# Altium PCB ADF4351_PLL.PcbDoc
Units mil, origin at the board's own origin, x right, y up, seen from the top; angles counter-clockwise.
Board outline 1874.02 x 1496.06 mil, 4 copper layers (Top Layer, GND, Power, Bottom Layer), stack 30.634 mil thick; 76 components, 40 nets, 220 pads, 215 vias.
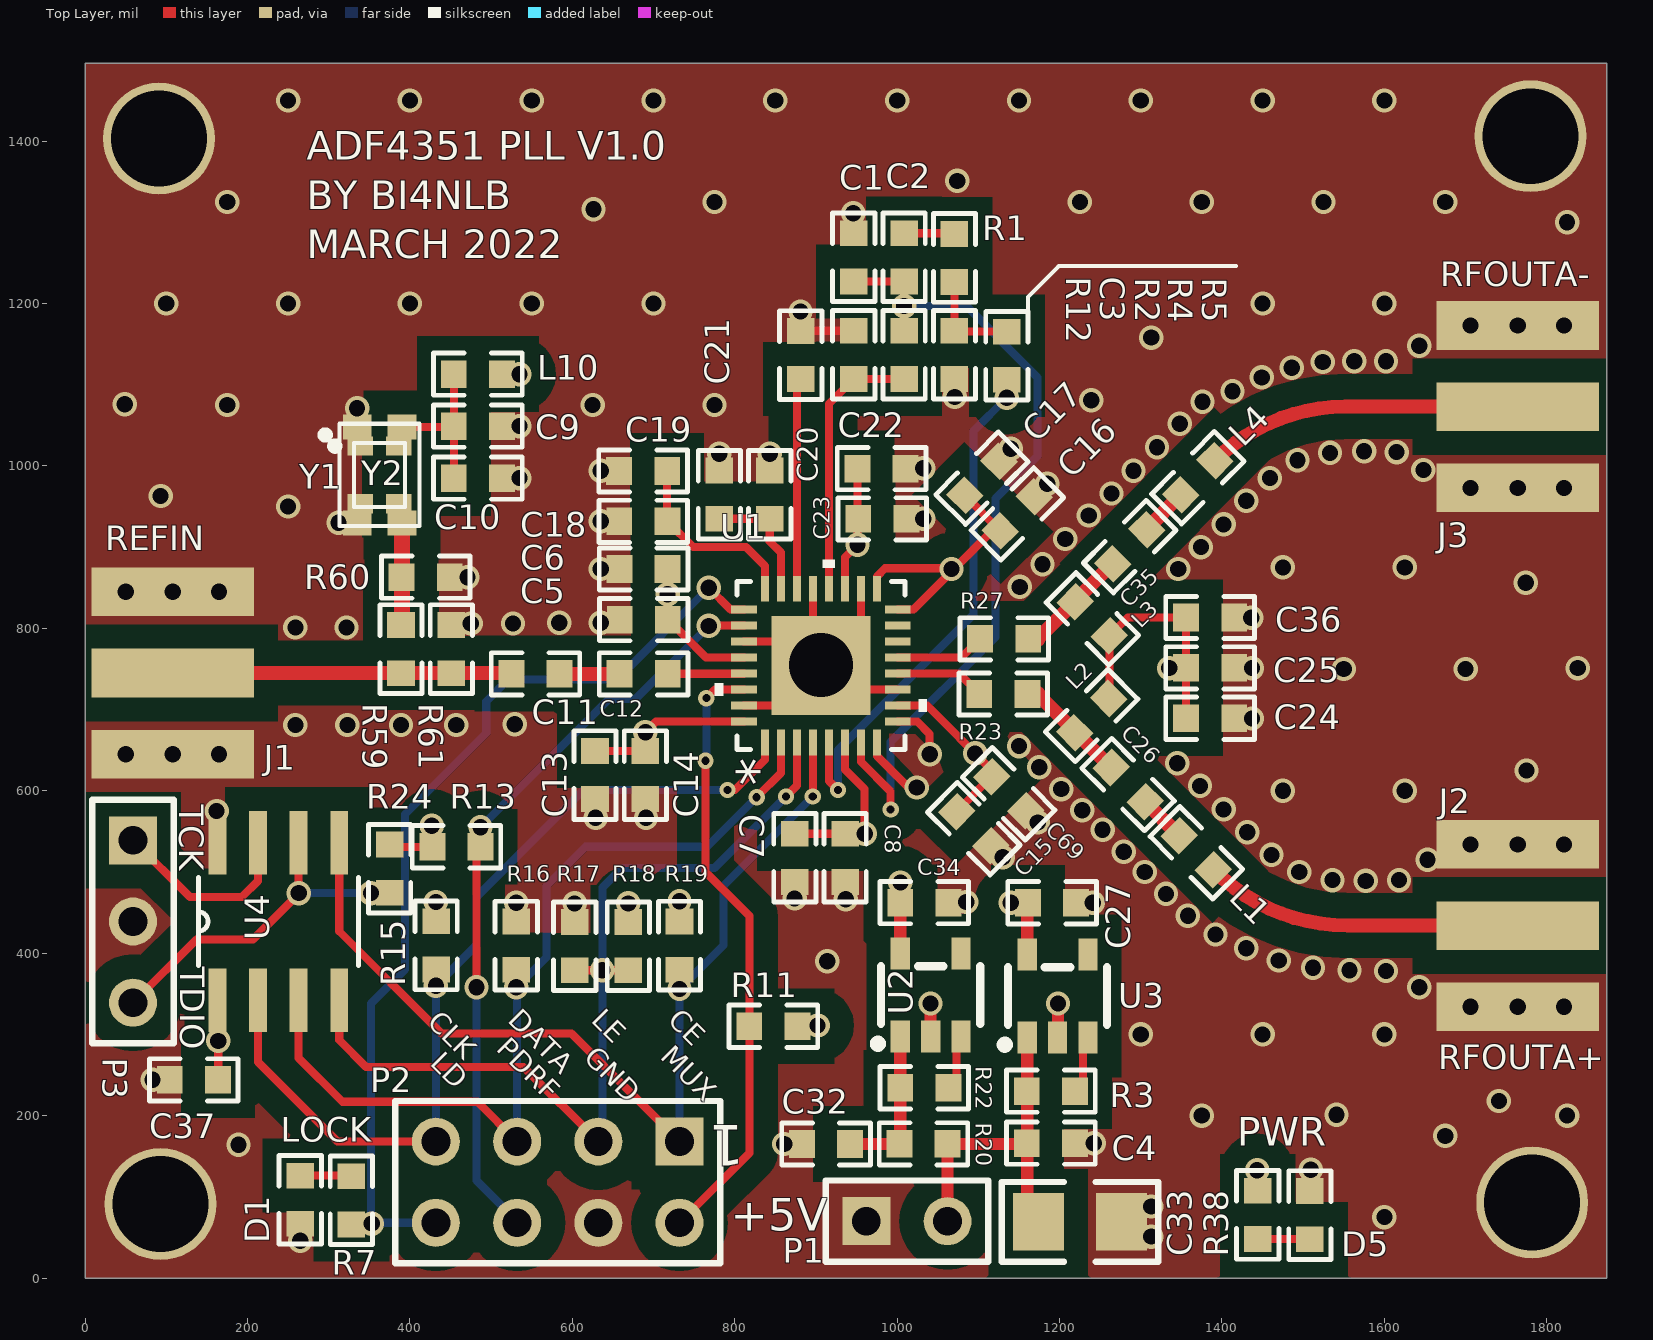
[diagram p0: Top Layer view]
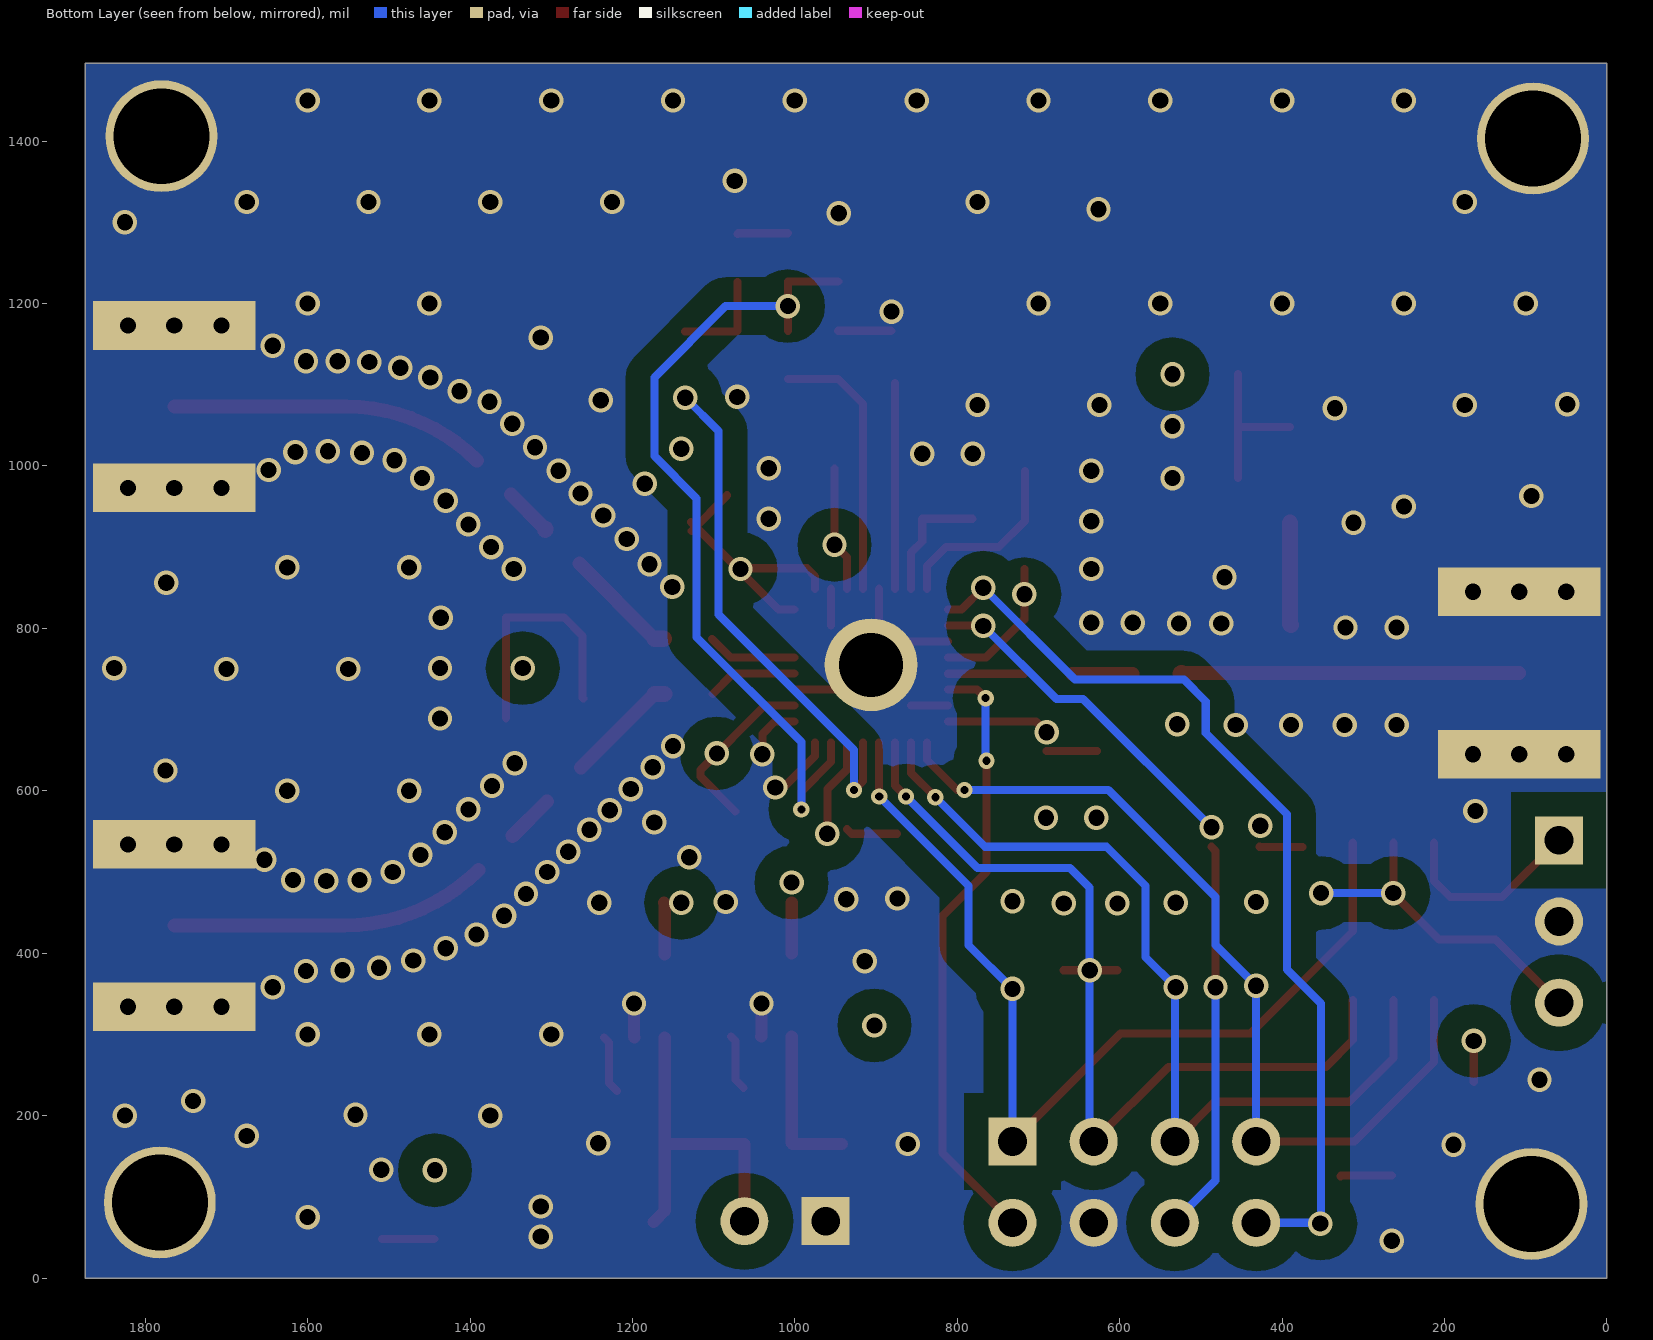
[diagram p1: Bottom Layer view, seen from below]
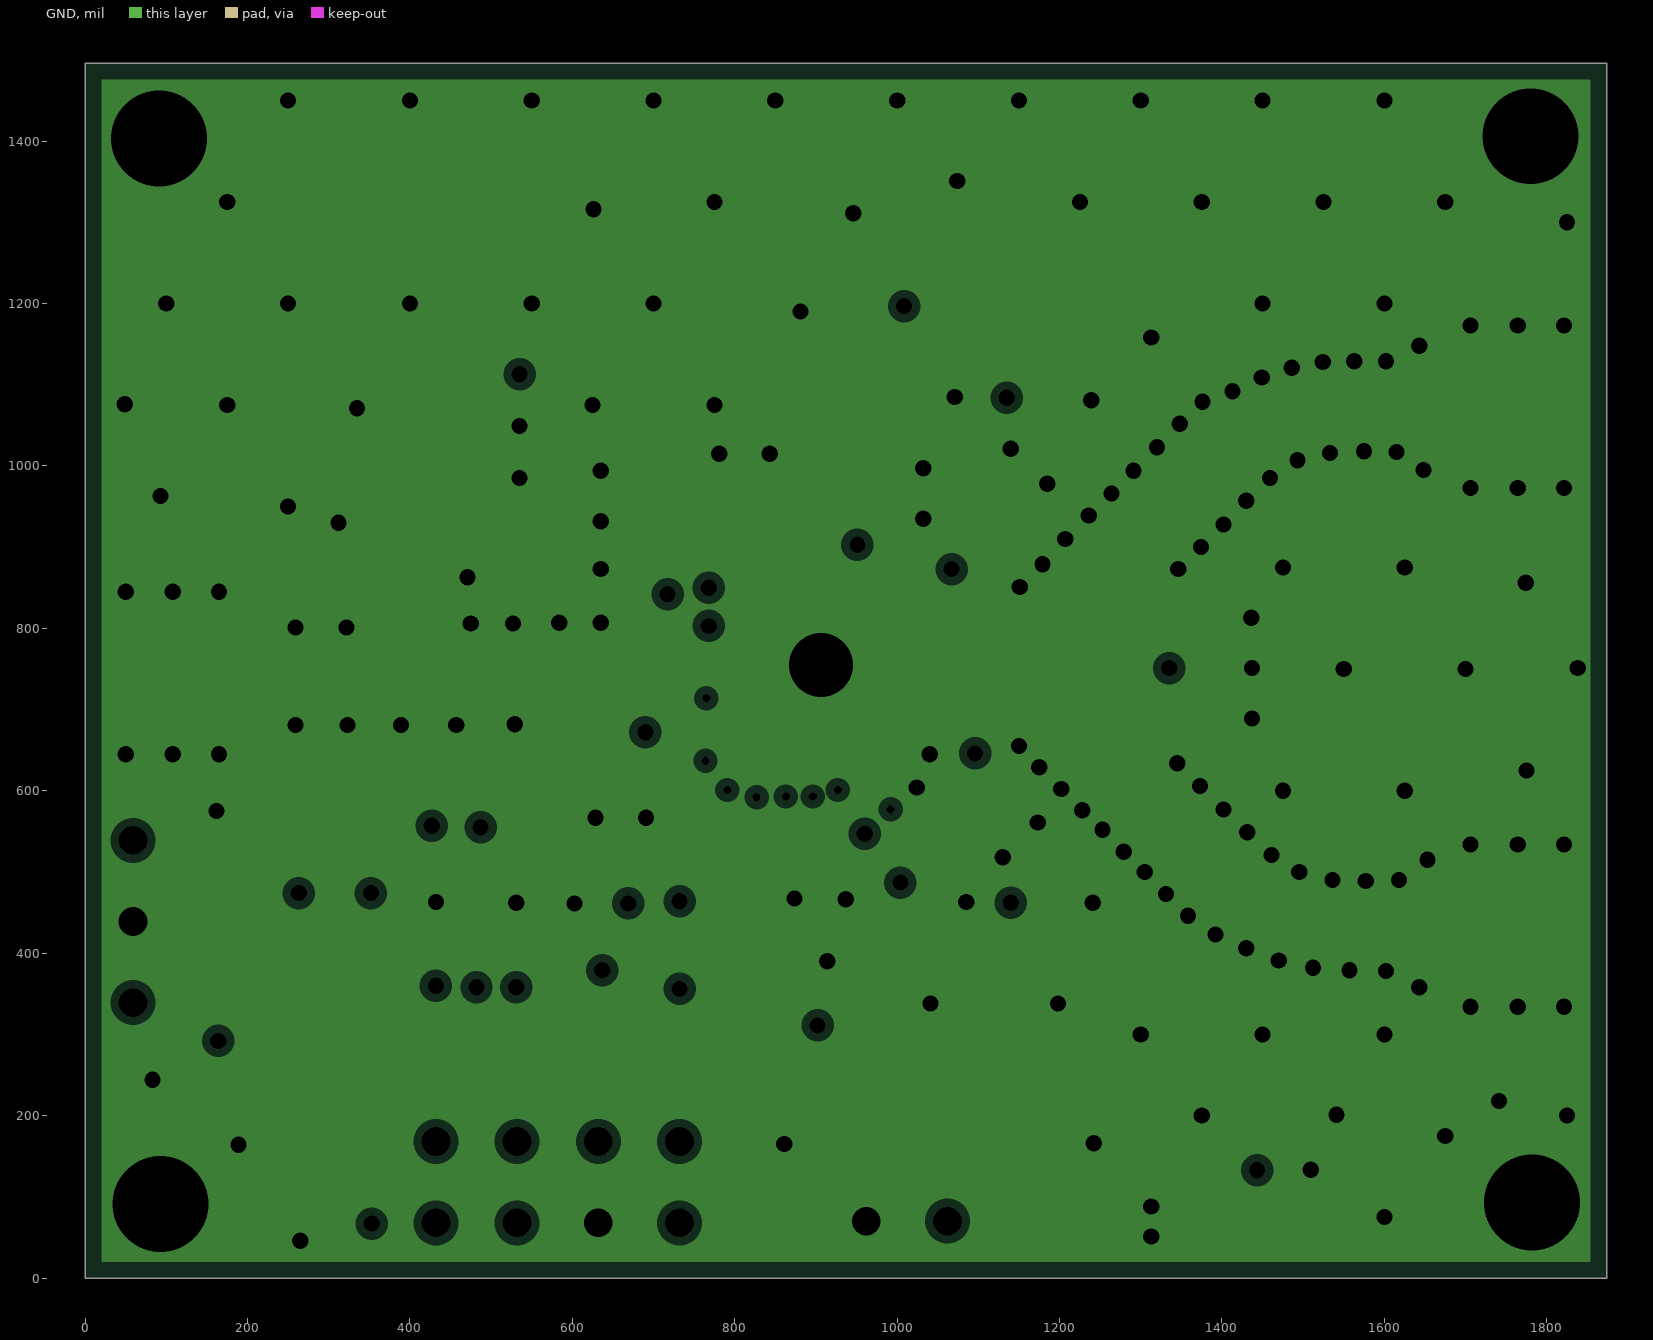
[diagram p2: GND, clearances drawn from the general rule]
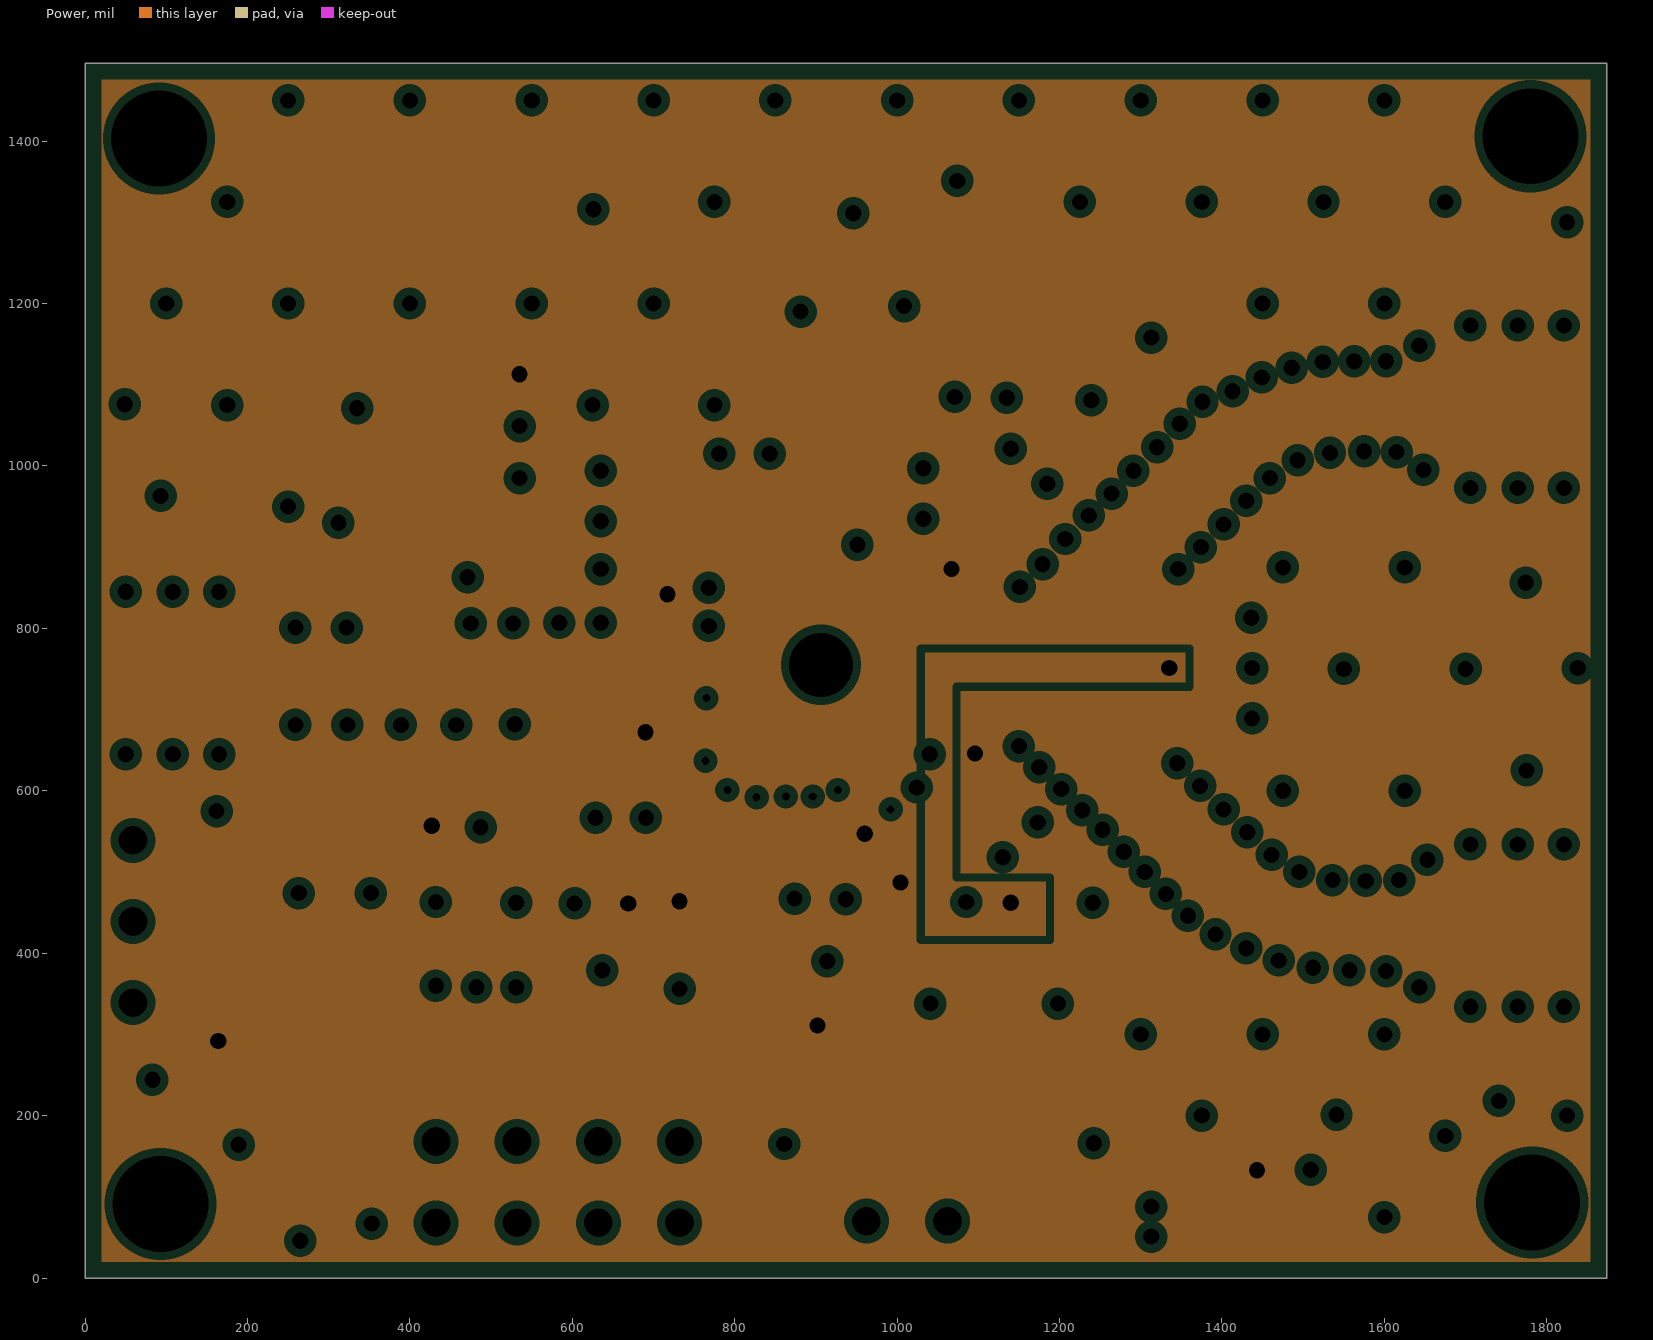
[diagram p3: Power, clearances drawn from the general rule]

## Layer stack, top to bottom
Top Solder: solder mask 0.4, Solder Resist, Dk 3.5
Top Layer: signal copper 1.4
Dielectric 1: core 10, FR-4, Dk 4.2
GND: plane copper 1.417, net GND
Dielectric 3: prepreg 5, Dk 4.2
Power: plane copper 1.417, net AVDD
Dielectric 2: core 10, Dk 4.2
Bottom Layer: signal copper 1.4
Bottom Solder: solder mask 0.4, Solder Resist, Dk 3.5

## Board outline
0,1496.06 0,0 1874.02,0 1874.02,1496.06 0,1496.06

## Design rules (kind name [scope] priority, off if disabled: settings)
Clearance [All] p1: gap=5
ComponentClearance [All] p1: gap=0 collisioncheckmode=3 verticalgap=0 showdistances=FALSE
HoleSize [All] p1: absolutevalues=TRUE maxlimit=1000 minlimit=1 maxpercent=80.000 minpercent=20.000
HoleToHoleClearance [All] p1: gap=0 allowstackedmicrovias=TRUE
MinimumSolderMaskSliver [All] p1: minsoldermaskwidth=0
PlaneClearance [All] p1: clearance=10
PlaneConnect [All] p1: planeconnectstyle=Direct reliefexpansion=20 reliefentries=4 reliefconductorwidth=10 reliefairgap=10
PolygonConnect [All] p1: connectstyle=Direct reliefconductorwidth=10 reliefentries=4 polygonreliefangle="90 Angle" airgapwidth=10
RoutingVias [All] p1: holewidth=28 width=50 viastyle="Through Hole" minholewidth=5 minwidth=5 maxholewidth=30 maxwidth=50
SilkToSilkClearance [All] p1: silktosilkclearance=0
SilkToSolderMaskClearance [IsPad] p1: minsilkscreentomaskgap=0 clearancetoexposedcopper=TRUE
SolderMaskExpansion [All] p1: expansion=4
UnpouredPolygon [All] p1: allowunpoured=FALSE
Width [All] p1: maxlimit=100 minlimit=10 preferedwidth=10 minimp=50.000000 maximp=50.000000 favimp=50.000000
21 further rules are at their usual default settings.

## Components (designator, comment, footprint, x,y, rotation, side; value= is the part's Value field where it differs from the comment)
C1 "Cap" 0603E#1 946.53,1286.44 r270 top
C2 "Cap" 0603E#1 1008.53,1286.44 r270 top
C3 "Cap" 0603E#1 946.53,1166.44 r270 top
C4 "Cap" 0603E#1 1159.69,166.1 r0 top
C5 "Cap" 0603E#1 717.6,810.78 r180 top
C6 "Cap" 0603E#1 717.35,873.1 r180 top
C7 "Cap" 0603E#1 874,547 r270 top
C8 "Cap" 0603E#1 936,547 r270 top
C9 "Cap" 0603E#1 454.08,1049 r0 top
C10 "Cap" 0603E#1 454.08,985 r0 top
C11 "Cap" 0603E#1 525,744 r0 top
C12 "Cap" 0603E#1 658.08,744 r0 top
C13 "Cap" 0603E#1 628,649 r270 top
C14 "Cap" 0603E#1 690,649 r270 top
C15 "Cap" 0603E#1 1073.38,574.31 r315 top
C16 "Cap" 0603E#1 1127,920 r45 top
C17 "Cap" 0603E#1 1083.47,963.91 r45 top
C18 "Cap" 0603E#1 717.16,931.77 r180 top
C19 "Cap" 0603E#1 716.8,993.77 r180 top
C20 "Cap" 0603E#1 843.08,935 r90 top
C21 "Cap" 0603E#1 781.08,935 r90 top
C22 "Cap" 0603E#1 951.12,996.72 r0 top
C23 "Cap" 0603E#1 952.12,934.72 r0 top
C24 "Cap" 0603E#1 1355.69,689.32 r0 top
C25 "Cap" 0603E#1 1355.69,751.32 r0 top
C26 "Cap" 0603E#1 1263.4,628.6 r315 top
C27 "Cap" 0603E#1 1161.09,462.09 r0 top
C32 "Cap" 0603E#1 942.08,165 r180 top
C33 "Cap" R1206 1225.08,69 r0 top
C34 "Cap" 0603E#1 1003.87,462.29 r0 top
C35 "Cap" 0603E#1 1265.4,879.6 r45 top
C36 "Cap" 0603E#1 1355.69,813.32 r0 top
C37 "Cap" 0603E#2 134,244 r180 top
C69 "Cap" 0603E#1 1116.38,617.31 r315 top
D1 "LED0" 0603E#1 265,126 r270 top
D5 "LED0" 0603E#1 1508.23,47.81 r90 top
J1 "" SMA 108.08,745 r90 top
J2 "" SMA 1764.08,433.91 r90 top
J3 "" SMA 1764.08,1072.91 r270 top
L1 "Inductor" 0603E#1 1347.4,544.6 r315 top
L2 "Inductor" 0603E#1 1260.4,713.6 r225 top
L3 "Inductor" 0603E#1 1219.4,832.6 r315 top
L4 "Inductor" 0603E#1 1349.4,964.6 r45 top
L10 "Inductor" 0603E#1 454.08,1113 r0 top
P1 "Header 2" HDR1X2 962.08,70 r0 top
P2 "Header 4X2" HDR2X4 732,168 r180 top
P3 "Header 3" HDR1X3 59,539 r270 top
R1 "Res2" 0603E#1 1070.53,1226.44 r90 top
R2 "Res2" 0603E#1 1008.53,1166.44 r270 top
R3 "Res2" 0603E#1 1159.69,230.1 r0 top
R4 "Res2" 0603E#1 1070.53,1166.44 r270 top
R5 "Res2" 0603E#1 1135.08,1106 r90 top
R7 "Res2" 0603E#1 328,66 r90 top
R11 "Res2" 0603E#1 818,310 r0 top
R12 "Res2" 0603E#1 881.31,1166.2 r270 top
R13 "Res2" 0603E#1 487,531 r180 top
R15 "Res2" 0603E#1 432.23,439.2 r270 top
R16 "Res2" 0603E#1 531,439 r270 top
R17 "Res2" 0603E#1 603,438.31 r270 top
R18 "Res2" 0603E#1 669,438.31 r270 top
R19 "Res2" 0603E#1 732,439 r270 top
R20 "Res2" 0603E#1 1062.09,165.09 r180 top
R22 "Res2" 0603E#1 1003.87,234.29 r0 top
R23 "Res2" 0603E#1 1160.4,719.09 r180 top
R24 "Res2" 0603E#2 375,504 r90 top
R27 "Res2" 0603E#1 1161.4,787.09 r180 top
R38 "Res2" 0603E#1 1444,48 r90 top
R59 "Res2" 0603E#1 389.09,804.09 r270 top
R60 "Res2" 0603E#1 449.09,863.09 r180 top
R61 "Res2" 0603E#1 451.09,804.09 r270 top
U1 "ADF4351BCPZ" CP-32-7_ADI 906.09,754.09 r90 top locked
U2 "ADP150AUJZ-3.3-R7" SOT-23-5_L3.0-W1.7-P0.95-LS2.8-BR 1003.87,297.29 r90 top
U3 "ADP150AUJZ-3.3-R7" SOT-23-5_L3.0-W1.7-P0.95-LS2.8-BR 1160.09,296.09 r90 top
U4 "MSP430G2230ID" D8 238,439 r90 top
Y1 "DSB321SDA" 3225 335.08,1048 r270 top
Y2 "DSB321SDA" 2016 339.02,1024.38 r270 top

## Footprints (in the part's own frame and the unit in brackets; to place one, negate y for a bottom-side part, rotate by r counter-clockwise, add the part's x,y. Pads: shape width x height; smd on the part's side, far side on the other; paste and mask are expansions set on the pad)
0603E#1 [mil]
  rect 31.75x34.02 smd: 1(0,0) 2(59.31,0)
  silkscreen extent -25,-26 84,26
0603E#2 [mil]
  rect 31.75x34.02 smd: 1(-29.65,0) 2(29.66,0)
  silkscreen extent -55,-26 55,26
2016 [mm]
  rect 0.6x0.8 smd: 1(0,0) 2(1.8,0) 3(1.8,1.2) 4(0,1.2)
  silkscreen extent -0.11,-0.91 1.9,1.4
3225 [mm]
  rect 0.78x0.9 smd: 1(0,0) 2(3,0) 3(3,1.4) 4(0,1.4)
  silkscreen extent -0.1,-1.11 3.1,1.95
CP-32-7_ADI [mm]
  rect 0.805x0.249 smd paste+0 mask+0: 1(-2.402,1.75) 2(-2.402,1.25) 3(-2.402,0.75) 4(-2.402,0.25) 5(-2.402,-0.25) 6(-2.402,-0.75) 7(-2.402,-1.25) 8(-2.402,-1.75) 17(2.402,-1.75) 18(2.402,-1.25) 19(2.402,-0.75) 20(2.402,-0.25) 21(2.402,0.25) 22(2.402,0.75) 23(2.402,1.25) 24(2.402,1.75)
  rect 0.249x0.805 smd paste+0 mask+0: 9(-1.75,-2.402) 10(-1.25,-2.402) 11(-0.75,-2.402) 12(-0.25,-2.402) 13(0.25,-2.402) 14(0.75,-2.402) 15(1.25,-2.402) 16(1.75,-2.402) 25(1.75,2.402) 26(1.25,2.402) 27(0.75,2.402) 28(0.25,2.402) 29(-0.25,2.402) 30(-0.75,2.402) 31(-1.25,2.402) 32(-1.75,2.402)
  rect 3.1x3.1 smd mask-1.537: 33(0,0)
  silkscreen extent -2.63,-3.31 3.31,3.31
D8 [mil]
  rect 78x22 smd: 1(-97,75) 2(-97,25) 3(-97,-25) 4(-97,-75) 5(97,-75) 6(97,-25) 7(97,25) 8(97,75)
  silkscreen extent -54,-98 54,98
HDR1X2 [mm] "Connector; Header; 2 Position"
  rect 1.5x1.5 hole 0.9: 1(0,0)
  round 1.5 hole 0.9: 2(2.54,0)
  silkscreen extent -1.27,-1.27 3.81,1.27
HDR1X3 [mm] "Connector; Header; 3 Position"
  rect 1.5x1.5 hole 0.9: 1(0,0)
  round 1.5 hole 0.9: 2(2.54,0) 3(5.08,0)
  silkscreen extent -1.27,-1.27 6.35,1.27
HDR2X4 [mm] "Connector; Header; 4x2 Position"
  rect 1.5x1.5 hole 0.9: 1(0,0)
  round 1.5 hole 0.9: 2(0,2.54) 3(2.54,0) 4(2.54,2.54) 5(5.08,0) 6(5.08,2.54) 7(7.62,0) 8(7.62,2.54)
  silkscreen extent -1.27,-1.27 8.89,3.81
R1206 [mm]
  rect 1.6x1.8 smd: 1(-1.301,0) 2(1.299,0)
  silkscreen extent -2.45,-1.25 2.45,1.25, body extent -1.6,-0.79 1.6,0.81, height 1
SMA [mm]
  rect 1.52x5.08 smd: 1(0,0) S1(-2.54,0) S2(2.54,0)
  rect 1.52x5.08 smd far side: S3(-2.54,0) S4(2.54,0)
SOT-23-5_L3.0-W1.7-P0.95-LS2.8-BR [mm]
  rect 1x0.6 smd: 1(0,0) 2(0,-0.95) 3(0,-1.9) 4(2.6,-1.9) 5(2.6,0)
  silkscreen extent -0.35,-2.5 2.2,0.83

## Part data
C1 C2 C3 C4 C5 C6 C7 C8 C9 C10 C11 C12 C13 C14 C15 C16 C17 C18 C19 C20 C21 C22 C23 C24 C25 C26 C27 C32 C33 C34 C35 C36 C37 C69: "Capacitor"
D1 D5: "Typical INFRARED GaAs LED"
J1 J2 J3: library part CONSMA013.031, "SMA Connector Plug, Male Pin 50Ohm Board Edge, End Launch; Panel Mount Solder"
P1: "Header, 2-Pin"
P2: "Header, 4-Pin, Dual row"
P3: "Header, 3-Pin"
R1 R2 R3 R4 R5 R7 R11 R12 R13 R15 R16 R17 R18 R19 R20 R22 R23 R24 R27 R38 R59 R60 R61: "Resistor"
U1 U4: "No Description Available"

## Free pads (board coordinates)
  round 137.8 hole 118.11: 0(91,1403) 1(1780,1406) 2(1782,93) 3(93,91)
  round 114.17 hole 78.74: 0(906.09,755.09)

## Via types
v1: diameter 30, hole 20, Top Layer to Bottom Layer, 207 vias
v2: diameter 20, hole 10, Top Layer to Bottom Layer, 8 vias

## Nets (pads, with @x,y where several pads share a name; then routed paths per layer and width w, separated by ;. In a path a pad name is that pad's centre, name@x,y a point inside that pad or via, vN(x,y) a via of type N, cw(c..) or ccw(c..) an arc to the next point about the centre after c; other vN are vias at no path point)
AVDD: C5.1 C6.1 C7.1 C8.1 C13.1 C14.1 C15.1 C16.1 C17.1 C34.1 C37.1 C69.1 L10.2 R11.2 R13.2 R18.1 R19.1 R24.2 R38.2 U1.6 U1.10 U1.16 U1.17 U1.28 U1.32 U2.5 U4.1 | length 1281.7
  Top Layer w10: C37.1@164,241.66 v1(164,292) ; R24.2@375,530.66 427.34,530.66 R13.2 ; C13.1 C14.1 ; v1@689.69,671.69 703.2,685.2 U1.32 ; C6.1 717.35,811.03 C5.1 764.44,763.94 U1.28 ; C7.1 930,547 C8.1@935.62,552.62 ; U1.6 935.62,626.38 960,602 v1(960,547) ; U1.17 974.99,863.99 984.99,873.99 v1@1067,873.99 ; U1.10 1037.12,704.88 1116.38,625.62 C69.1 C15.1 ; U1.16 1020.07,822.99 C16.1@1128.08,931 ; U2.5@1003.22,400.31 U2.5 ; C17.1 1083.47,963.53 C16.1
  Top Layer w15: U2.5 C34.1
  other v1: 1443.23,132.81 902,311 668.78,461.26 732,464 1004,487 427,557 1096,646 690,672 717.35,842 1067,873 535,1113
CE: P2.1 R19.2 U1.4 U4.5 | length 1194.8
  Top Layer w10: U4.5 313,427 439,301 599,301 P2.1 ; v2(896,593) 896.25,593.25 U1.4
  Bottom Layer w10: P2.1 732,355.81 786,409.81 786,483 v2(896,593)
  other v1: 732,356
CLK: P2.7 R15.2 U1.1 U4.2 | length 1103.9
  Top Layer w10: U4.2 213,266 311,168 P2.7 ; v2(791,601) 800,601 837.2,638.2 U1.1
  Bottom Layer w10: P2.7 v1(432,360) 482,410 482,469 614,601 v2(791,601)
DATA: P2.5 R16.2 U1.2 U4.3 | length 1096.6
  Top Layer w10: U4.3 263,271 317,217 483,217 P2.5 ; v2(827,592) 856.88,621.88 U1.2
  Bottom Layer w10: P2.5 532,359 568,395 568,483 616,531 766,531 v2(827,592)
  other v1: 531,358
GND: C1.1 C3.1 C4.2 C5.2 C6.2 C7.2 C8.2 C9.2 C10.2 C13.2 C14.2 C15.2 C16.2 C17.2 C18.2 C19.2 C20.2 C21.2 C22.2 C23.2 C24.2 C25.2 C27.2 C32.2 C33.2 C34.2 C36.2 C37.2 C69.2 D1.2 D5.2 J1.S1 J1.S2 J1.S3 J1.S4 J2.S1 J2.S2 J2.S3 J2.S4 J3.S1 J3.S2 J3.S3 J3.S4 P1.1 P2.4 P3.2 pad.0 pad.1 pad.2 pad.3 R4.2 R12.1 R15.1 R16.1 R17.1 R60.1 R61.1 U1.8 U1.9 U1.11 U1.18 U1.21 U1.27 U1.31 U1.33 U2.2 U3.2 U4.8 Y1.1 Y1.2 Y2.1 Y2.2 | length 606.1
  Top Layer w10: U1.31 U1.33@856.88,704.88 ; U1.27 U1.33@876.57,783.62 ; R12.1 881.54,1166.44 C3.1 ; U1.33@896.25,763.94 U1.21 ; U1.33@935.62,724.57 U1.11 ; U1.33@955.31,803.31 U1.18 ; U1.8 974.99,643.01 1014,604 v1(1024,604) ; U1.9 1024.8,685.2 1040,670 v1(1040,645)
  Top Layer w15: v1(1041,338) 1041,297.56 U2.2 ; U3.2 1198,296.6 v1(1198,338)
  other v1: 265,46 1313,51 1600,75 1313,88 1509.23,133.19 189,164 861,165 1242,166 1675,175 1375,200 1825,200 1541,201 1741,218 83,244 1300,300 1450,300 1600,300 1706,333.91 1764.08,333.91 1821,333.91 1643,358 1602,378 1557,379 1512,382 914,390 1470,391 1430,406 1392,423 1358,446 602.78,461.26 531,462 1241,462 432,463 1085,463 936.7,466.28 873.7,467.28 1331,473 1577,489 1536,490 1618,490 1305,500 1495,500 1653,515 1130,518 1461,521 1279,525 1706,533.91 1764.08,533.91 1821,533.91 1431,549 1253,552 1173,561 628.69,566.74 690.69,566.74 162,575 1228,576 1402,577 1475,600 1625,600 1202,602 1373,606 1775,625 1175,629 1345,634 50,645 108.08,645 165,645 1150,655 259,681 323,681 389,681 457,681 529,682 1437,689 1550,750 1700,750 1437,751 1838,751 259,801 322,801 475,806 527,806 584,807 635,807 1436,813 50,845 108.08,845 165,845 1151,851 1774,856 471,863 635,873 1346,873 1475,875 1625,875 1179,879 1374,900 1207,910 1402,928 312,930 635,932 1032,935 1236,939 250,950 1430,957 93,963 1264,966 1706,972.91 1764.08,972.91 1821,972.91 1184.92,978 535,985 1459,985 635,994 1291,994 1648,995 1032,997 1493,1007 781,1015 843,1015 1533,1016 1615,1017 1575,1018 1139.92,1021 1320,1023 535,1049 1348,1052 335,1071 175,1075 625,1075 775,1075 49,1076 1376,1079 1239,1081 1071,1085 1413,1092 1449,1109 1486,1121 1524,1128 1563,1129 1602,1129 1643,1148 1313,1158 1706,1172.91 1764.08,1172.91 1821,1172.91 881,1190 100,1200 250,1200 400,1200 550,1200 700,1200 1450,1200 1600,1200 1825,1300 946,1311 626,1316 175,1325 775,1325 1225,1325 1375,1325 1525,1325 1675,1325 1074,1351 250,1450 400,1450 550,1450 700,1450 850,1450 1000,1450 1150,1450 1300,1450 1450,1450 1600,1450
LD: P2.8 R7.1 U1.25 | length 1167.5
  Top Layer w10: v1(768,850) 795.01,822.99 U1.25
  Bottom Layer w10: P2.8 352,68 352,338 394,380 394,571 494,671 494,710 521,737 655,737 v1(768,850)
  other v1: 353,67
LE: P2.3 R17.2 R18.2 U1.3 U4.4 | length 1143.3
  Top Layer w10: U4.4 313,293 346,260 540,260 P2.3 ; R17.2 R18.2 ; v2(863,593) 876.57,606.57 U1.3
  Bottom Layer w10: P2.3@637,168 637,481 661,505 775,505 v2(863,593)
  other v1: 637,379
MUXOUT: P2.2 R11.1 U1.30 | length 754.9
  Top Layer w10: P2.2 818,154 R11.1 818,446 764,500 v2(764,637) ; v2(765,714) 775.57,724.57 U1.30
  Bottom Layer w10: v2@765,637 v2(765,714)
NetC1_2: C1.2 C2.2 R2.1 U1.7 | length 1028.2
  Top Layer w10: C1.2 C2.2 v1(1008.53,1196.78) R2.1 ; U1.7 955.31,635.69 992,599 v2(992,577)
  Bottom Layer w10: v2(992,577) 992,660 1121,789 1121,960 1173,1012 1173,1109 1085.22,1196.78 v1(1008.53,1196.78)
NetC2_1: C2.1 R1.2 | length 62.3
  Top Layer w10: C2.1 1069.84,1286.44 R1.2
NetC3_2: C3.2 R2.2 U1.20 | length 333.1
  Top Layer w10: U1.20 915.94,1076.53 C3.2 R2.2
NetC4_1: C4.1 C33.1 P1.2 R3.1 R20.1 U3.1 | length 425.9
  Top Layer w15: P1.2 R20.1 1158.69,165.09 C4.1 ; U3.1 1160.09,82.78 C33.1
NetC9_1: C9.1 C10.1 L10.1 Y1.4 Y2.4 | length 190.9
  Top Layer w10: Y1.4 C9.1@453.08,1048 ; C10.1 C9.1 L10.1
NetC11_1: C11.1 J1.1 R59.2 R61.2 | length 417.3
  Top Layer w17.3: J1.1 C11.1@524,745
  Top Layer w20: C11.1@524,745 C11.1
NetC11_2: C11.2 C12.1 | length 73.8
  Top Layer w17.3: C11.2 C12.1
NetC12_2: C12.2 U1.29 | length 94.2
  Top Layer w10: C12.2 811.26,744 U1.29
NetC18_1: C18.1 C19.1 U1.24 | length 233.1
  Top Layer w10: C19.1 716.8,932.13 C18.1 748.93,900 814,900 837.2,876.8 U1.24
NetC20_1: C20.1 C21.1 U1.23 | length 154
  Top Layer w10: C21.1 C20.1 843.08,907 856.88,893.2 U1.23
NetC22_1: C22.1 C23.1 U1.19 | length 154.5
  Top Layer w10: U1.19 935.62,887.5 v1(951.12,903) C22.1
NetC26_1: C26.1 L2.2 R23.1 | length 140.5
  Top Layer w17.3: R23.1@1172.91,719.09 C26.1
  Top Layer w20: R23.1 R23.1@1172.91,719.09
NetC26_2: C26.2 L1.1 | length 59.5
  Top Layer w17.3: C26.2 L1.1
NetC32_1: C32.1 R20.2 R22.1 U2.1 | length 193.4
  Top Layer w15: C32.1 1002.69,165 R20.2 1003.87,166.18 R22.1 U2.1
NetC35_1: C35.1 L3.1 R27.1 | length 142.3
  Top Layer w17.3: R27.1@1172.9,787.09 C35.1
  Top Layer w20: R27.1 R27.1@1172.9,787.09
NetC35_2: C35.2 L4.1 | length 60.5
  Top Layer w17.3: C35.2@1307.34,922.54 L4.1
  Top Layer w20: C35.2 C35.2@1307.34,922.54
NetD1_1: D1.1 R7.2 | length 63.3
  Top Layer w10: D1.1 327.31,126 R7.2
NetD5_1: D5.1 R38.1 | length 64.3
  Top Layer w10: R38.1 1508.03,48 D5.1
NetJ2_1: J2.1 L1.2 | length 393.1
  Top Layer w17.3: L1.2 ccw(c1554.88,668.19) 1554.88,434.09 J2.1@1764.08,434.09
NetJ3_1: J3.1 L4.2 | length 390.5
  Top Layer w17.3: L4.2@1391.32,1006.44 cw(c1552,845.76) 1552,1073 ; 1552.03,1073.09 J3.1@1764.08,1073.09
NetR1_1: R1.1 R4.1 R5.2 | length 125
  Top Layer w10: R1.1 R4.1 1071.66,1165.31 R5.2
NetR3_2: R3.2 U3.3 | length 72.6
  Top Layer w10: R3.2 1229,240.09 1229,290.2 U3.3
NetR5_1: R5.1 U1.5 | length 632.3
  Top Layer w10: U1.5 915.94,612.06 v2(927,601)
  Bottom Layer w10: v2(927,601) 927,650 1094,817 1094,1043 v1(1135,1084)
NetR12_2: R12.2 U1.22 | length 253.5
  Top Layer w10: U1.22 R12.2@876.57,1102.15
NetR22_2: R22.2 U2.3 | length 69.4
  Top Layer w10: R22.2 1073,244.11 1073,291.61 U2.3
NetR23_2: R23.2 U1.12 | length 110.8
  Top Layer w10: U1.12 1075.94,744.25 R23.2
NetR27_2: R27.2 U1.13 | length 111
  Top Layer w10: U1.13 1078.94,763.94 R27.2
NetR59_1: R59.1 R60.2 Y1.3 Y2.3 | length 126.3
  Top Layer w20: R59.1 390.2,805.2 Y1.3
PDRF: P2.6 R13.1 U1.26 | length 913.1
  Top Layer w10: v1(482,358) 482,526 R13.1 ; v1(768,803) 768.31,803.31 U1.26
  Bottom Layer w10: v1(482,358) 482,120 532,70 P2.6 ; v1(487,555) 645,713 678,713 v1(768,803)
SBWTCK: P3.1 U4.7 | length 238.3
  Top Layer w10: P3.1 129,469 193,469 213,489 U4.7
SBWTDIO: P3.3 R24.1 U4.6 | length 411.5
  Top Layer w10: P3.3 137,417 207,417 263,473 U4.6
  Bottom Layer w10: v1(263,474) v1(352,474)
VOUT: C24.1 C25.1 C27.1 C36.1 L2.1 L3.2 U3.5 | length 369.2
  Top Layer w10: L2.1 1261.34,714.54 L3.2 1284.01,813.32 C36.1 C25.1 C24.1
  Top Layer w15: U3.5 1160.1,461.1 C27.1
  other v1: 1140,462 1335,751
pads on no net: U1.14 U1.15 U2.4 U3.4

## Polygon pours and split planes (outlines as drawn)
GND on Top Layer "Bottom Layer-No Net" (solid, remove dead copper, pour order 4): 0,1496.06 1874.02,1496.06 1874.02,0 0,0 0,1492.13 0,1496.06 3.94,1496.06
GND on Bottom Layer "Bottom Layer-No Net" (solid, remove dead copper, pour order 3): 0,1496.06 1874.02,1496.06 1874.02,0 0,0 0,1492.13 0,1496.06 3.94,1496.06
GND on GND (split plane): 1853.92,20.1 20.1,20.1 20.1,1475.97 1853.92,1475.97
VOUT on Power (split plane): 1354.9,733.1 1073,733.1 1071.05,732.71 1069.4,731.6 1068.29,729.95 1067.9,728 1067.9,493 1068.29,491.05 1069.4,489.4 1071.05,488.29 1073,487.9 1182.9,487.9 1182.9,421.1 1034.1,421.1 1034.1,769.9 1354.9,769.9
AVDD on Power (split plane): 1853.92,20.1 20.1,20.1 20.1,1475.97 1853.92,1475.97

## Other copper
Power (plane layer: these items are gaps in the copper):
  lines w10: 1029,416 1029,775 1360,775 1360,728 1073,728 1073,493 1188,493 1188,416 1029,416

## Silkscreen, mask and mechanical layers (free items; w line width, h text height)
Top Overlay:
  lines w5: 1161.09,1190.19 1161.09,1208.09 1199,1246 1417,1246
  text "ADF4351 PLL V1.0" at 273,1377 h35
  text "BY BI4NLB" at 273,1316 h35
  text "MARCH 2022" at 273,1256 h35
  text "RFOUTA-" at 1669,1221 h30
  text "REFIN" at 25,896 h30
  text "TCK" at 116,583 h30 r270
  text "TDIO" at 117,383 h30 r270
  text "DATA" at 519,316 h25 r315
  text "LE" at 622,316 h25 r315
  text "CE" at 716,316 h25 r315
  text "CLK" at 420,314 h25 r315
  text "PDRF" at 505,281 h25 r315
  text "MUX" at 707,271 h25 r315
  text "GND" at 613,270 h25 r315
  text "LD" at 424,263 h25 r315
  text "RFOUTA+" at 1666,257 h30
  text "LOCK" at 241,168 h30
  text "PWR" at 1419,163 h35
  text "+5V" at 795,58 h40
Top Solder:
  lines w10: 717.39,744 811.26,744 ; 1000.68,744.25 1075.94,744.25 1101.09,719.09 ; 1000.68,763.94 1078.94,763.94 1102.09,787.09
  lines w17.3: 108.08,745 524,745 ; 586.5,744 660.27,744 ; 1172.91,719.09 1263.4,628.6 ; 1172.9,787.09 1265.4,879.6 ; 1305.34,586.66 1347.4,544.6 ; 1307.34,922.54 1349.4,964.6 ; 1389.34,502.66 ccw(c1554.88,668.19) 1554.88,434.09 1764.08,434.09 ; 1391.34,1006.54 cw(c1552.03,845.85) 1552.03,1073.09 ; 1552.95,1073.19 1765,1073.19
Mechanical 1:
  the board outline again, w5

## Text inside footprints (layer, text, board x,y; h text height)
P2: Top Overlay "1" at 812,188 h50 r180
U1: Top Overlay "*" at 852.35,606.17 h50 r90; Mechanical 13 "*" at 852.29,606.19 h50 r90